# Altium PCB v0 - Copy.PcbDoc
Units mil, origin at the board's own origin, x right, y up, seen from the top; angles counter-clockwise.
Board outline 4539.37 x 1732.28 mil, 2 copper layers (Top Layer, Bottom Layer), stack 65.398 mil thick; 4 components, 67 nets, 201 pads, 41 vias.
Unrouted connection lines stored in the file: 78.
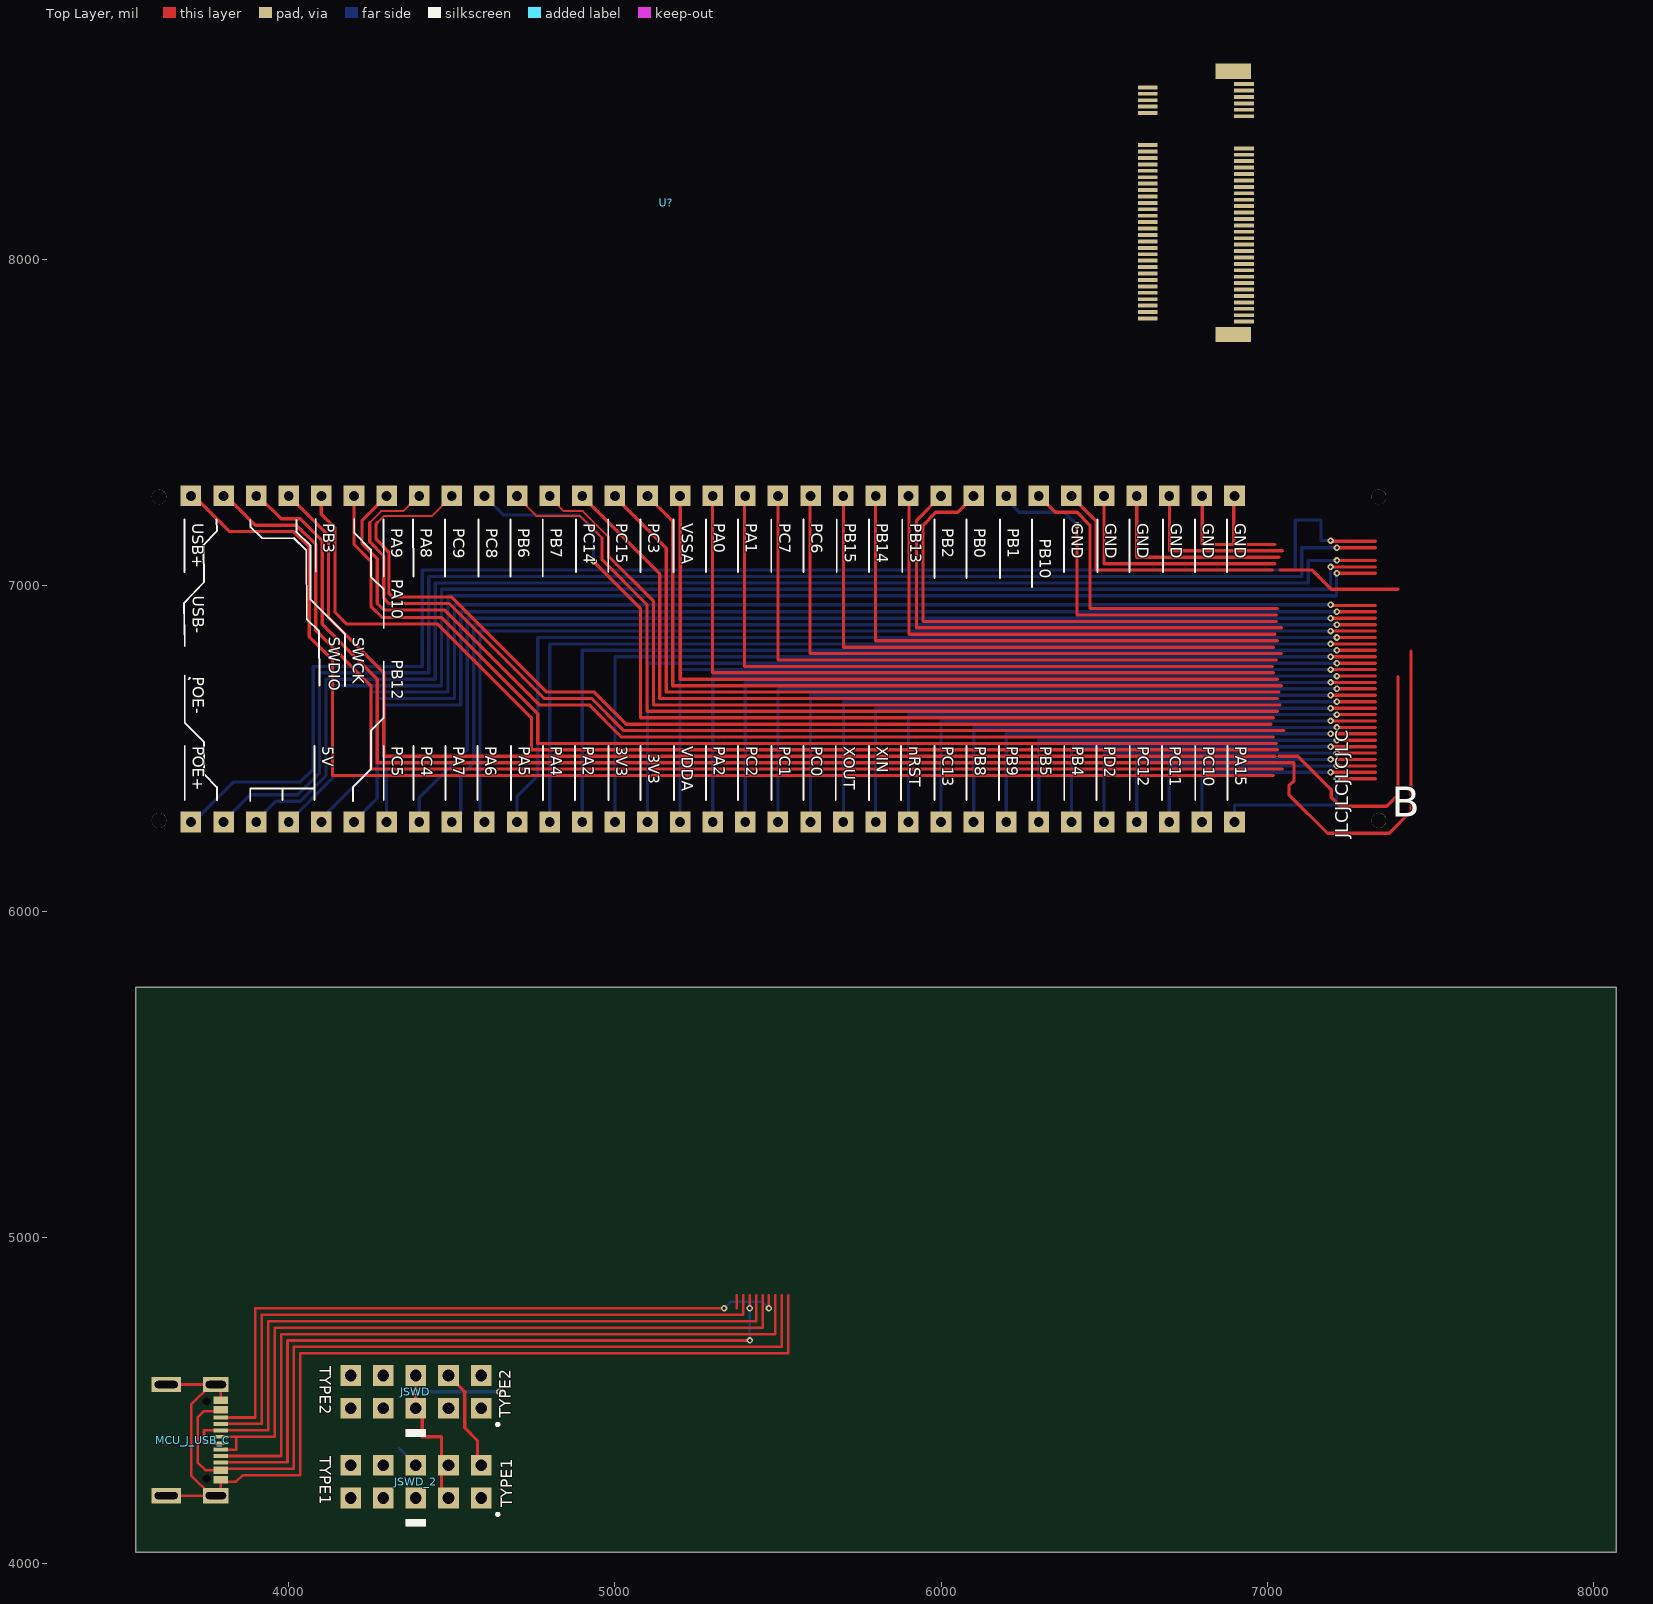
[diagram p0: Top Layer view]
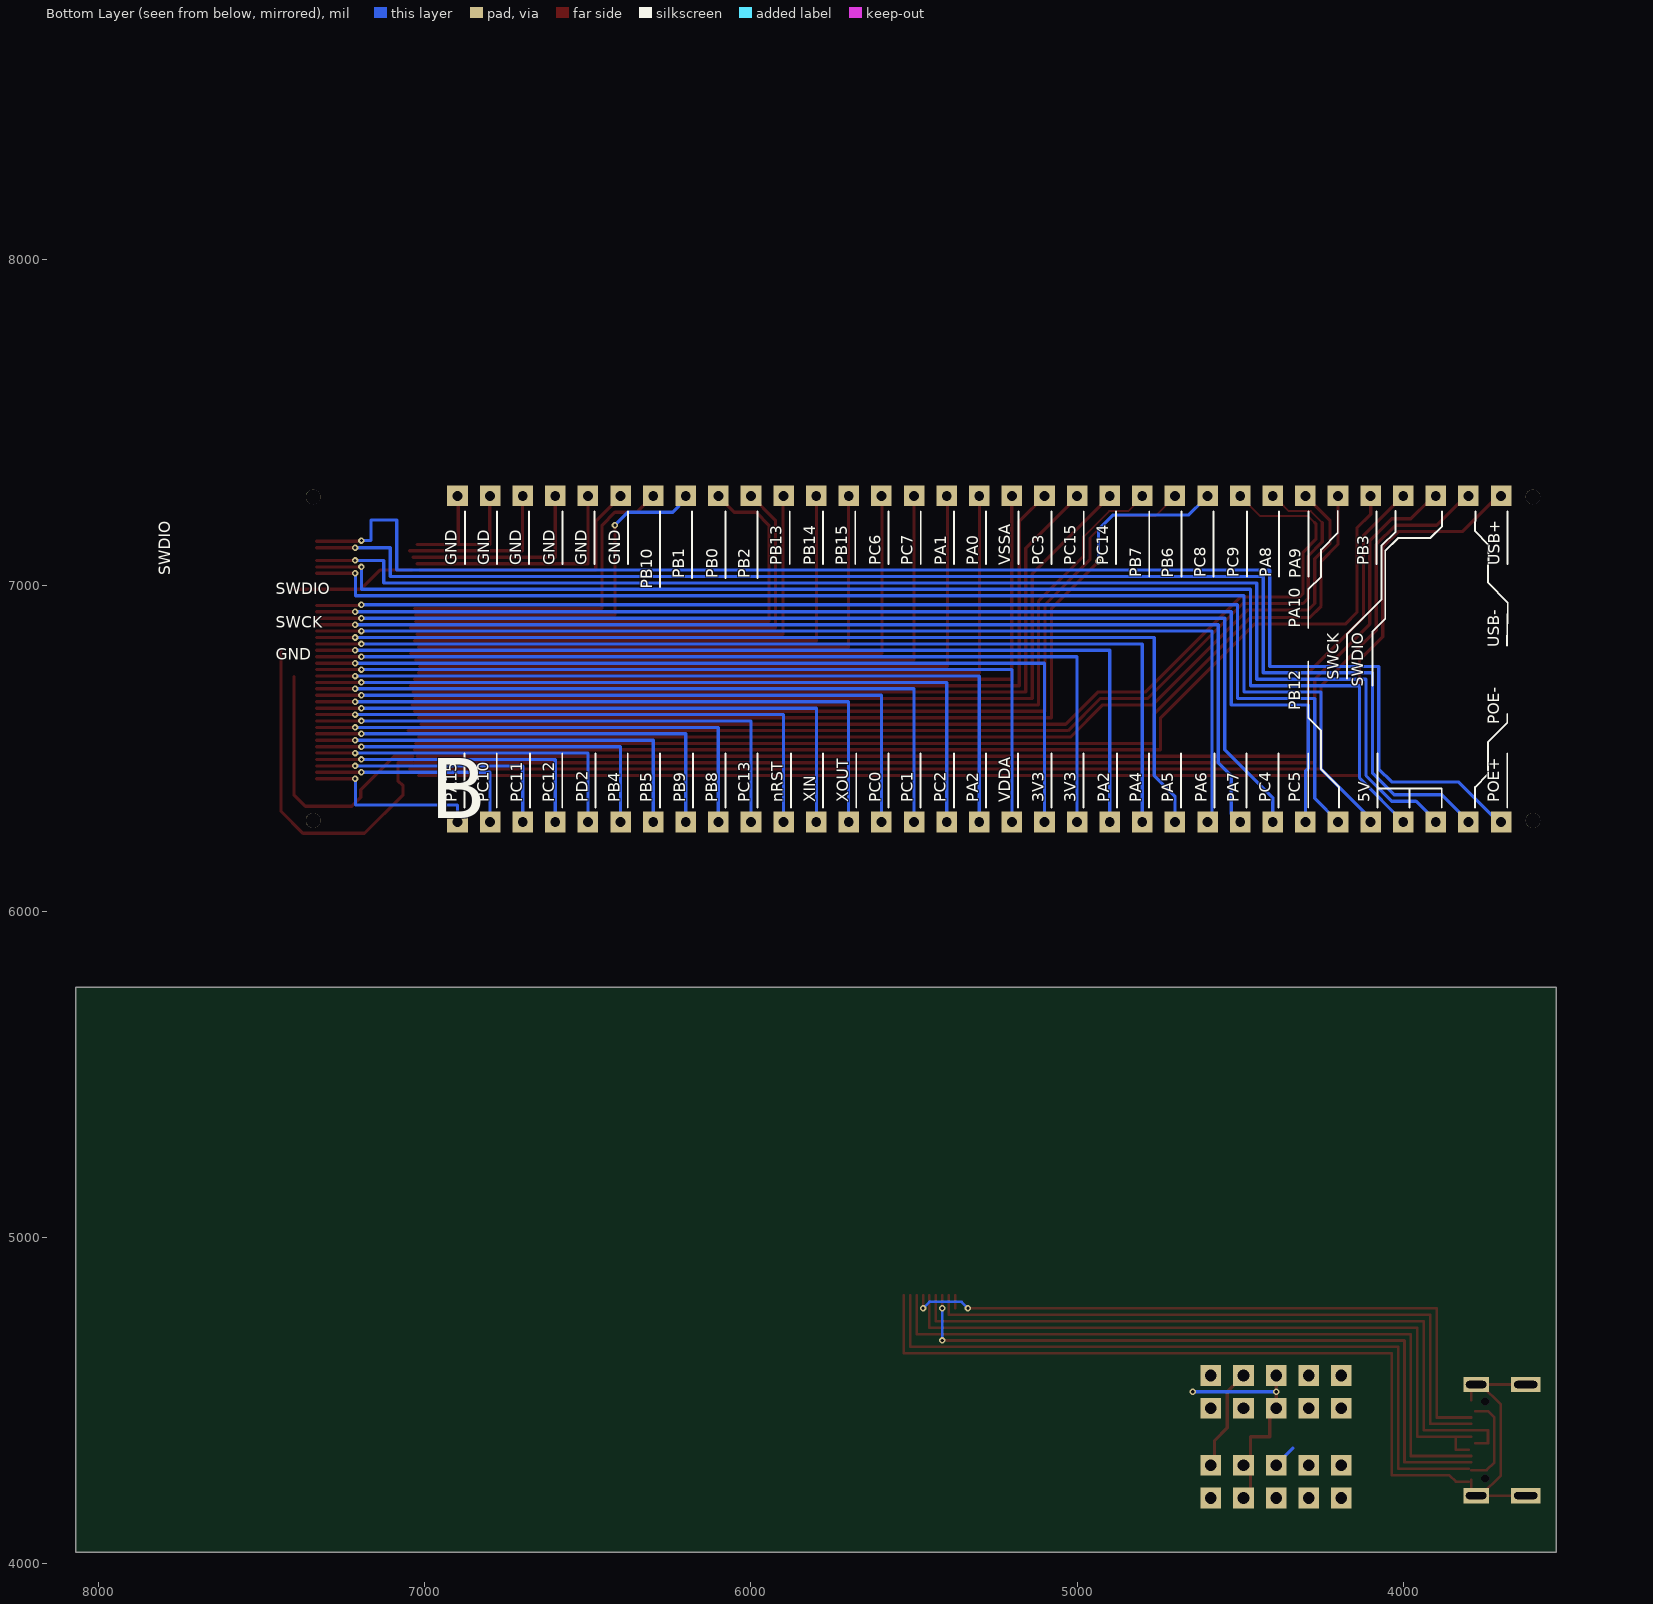
[diagram p1: Bottom Layer view, seen from below]

## Layer stack, top to bottom
Top Solder: solder mask 0.4, Solder Resist, Dk 3.5
Top Layer: signal copper 1.4
Dielectric 1: core 62.5984, FR-4, Dk 4.2
Bottom Layer: signal copper 1.4
Bottom Solder: solder mask 0.4, Solder Resist, Dk 3.5

## Board outline
3531.5,4035.43 3531.5,5767.72 8070.87,5767.71 8070.87,4035.43

## Design rules (kind name [scope] priority, off if disabled: settings)
Clearance [All] p1: gap=7.87 ignorepadtopadclearanceinfootprint=FALSE except(0: Arc-Hole Track-Hole SMDPad-Hole THPad-Hole Via-Hole Fill-Hole Poly-Hole Region-Hole Text-Hole)
PolygonConnect [All] p1: thpad.connectstyle=Relief thpad.reliefconductorwidth=10 thpad.reliefentries=4 thpad.polygonreliefangle="90 Angle" thpad.airgapwidth=10 smdpad.connectstyle=Relief smdpad.reliefconductorwidth=10 smdpad.reliefentries=4 smdpad.polygonreliefangle="90 Angle" smdpad.airgapwidth=10 via.connectstyle=Direct via.reliefconductorwidth=10 via.reliefentries=4 via.polygonreliefangle="90 Angle" via.airgapwidth=10
RoomDefinition v0 [InComponentClass('v0')] p1: confinementstyle=ConfineIn formatcopy=TRUE lockcomponents=FALSE outline 0,0 2000,0 2000,1000 0,1000
RoutingVias [All] p1: holewidth=28 width=50 viastyle="Through Hole" minholewidth=28 minwidth=50 maxholewidth=28 maxwidth=50
SolderMaskExpansion [All] p1: expansion=4
Width [All] p1: maxlimit=39.37 minlimit=5.91 preferedwidth=7.87
30 further rules are at their usual default settings.

## Components (designator, comment, footprint, x,y, rotation, side; value= is the part's Value field where it differs from the comment)
JSWD "DS1023-2*5SF11" HDR_FEM_2X5P 4389.76,4527.56 r180 top
JSWD_2 "DS1023-2*5SF11" HDR_FEM_2X5P 4389.76,4251.97 r180 top
MCU_J_USB_C "918-418K2023S40001" DX07S016JA1R1500 3661.42,4379.92 r270 top
U? "BITSNAP_GF_B" POWERNET-MAC 6791.34,8173.23 r90 top

## Footprints (in the part's own frame and the unit in brackets; to place one, negate y for a bottom-side part, rotate by r counter-clockwise, add the part's x,y. Pads: shape width x height; smd on the part's side, far side on the other; paste and mask are expansions set on the pad)
DX07S016JA1R1500 [mm] "USB-C (USB TYPE-C) USB 2.0 Receptacle Connector 24 (16+8 Dummy) Position Surface Mount, Right Angle"
  rect 1.2x2 hole 0.55 slot 1.6 at 90 deg: 0(-4.32,2.917) 0(4.33,2.917)
  rect 1.2x2.3 hole 0.55 slot 1.8 at 90 deg: 0(-4.32,-0.943) 0(4.33,-0.943)
  rect 0.6x1.15 smd: A1_B12(-3.1,3.297) A4_B9(-2.35,3.297) A9_B4(2.35,3.3) A12_B1(3.1,3.297)
  rect 0.3x1.15 smd: A5(-1.25,3.297) A6(-0.25,3.297) A7(0.25,3.3) A8(1.25,3.297) B5(1.75,3.297) B6(0.75,3.297) B7(-0.75,3.297) B8(-1.75,3.297)
  round 0 hole 0.65 unplated: M(-3,2.2) M(3,2.2)
  body extent -4.47,-3.35 4.47,3.55, height 3.18
HDR_FEM_2X5P [mm] "10 Pin 2 Row Header"
  rect 1.6x1.6 hole 0.9: 1(-5.08,1.27) 2(-5.08,-1.27) 3(-2.54,1.27) 4(-2.54,-1.27) 5(0,1.27) 6(0,-1.27) 7(2.54,1.27) 8(2.54,-1.27) 9(5.08,1.27) 10(5.08,-1.27)
  silkscreen extent -6.47,2.44 -6.27,2.64
POWERNET-MAC [mm] "IC - Powernet MAC - NGFF B KEY, TE 2199119-3"
  rect 0.3x1.55 smd: 1(9.25,-3.5) 2(9,4) 3(8.75,-3.5) 4(8.5,4) 5(8.25,-3.5) 6(8,4) 7(7.75,-3.5) 8(7.5,4) 9(7.25,-3.5) 10(7,4) 11(6.75,-3.5) 20(4.5,4) 21(4.25,-3.5) 22(4,4) 23(3.75,-3.5) 24(3.5,4) 25(3.25,-3.5) 26(3,4) 27(2.75,-3.5) 28(2.5,4) 29(2.25,-3.5) 30(2,4) 31(1.75,-3.5) 32(1.5,4) 33(1.25,-3.5) 34(1,4) 35(0.75,-3.5) 36(0.5,4) 37(0.25,-3.5) 38(0,4) 39(-0.25,-3.5) 40(-0.5,4) 41(-0.75,-3.5) 42(-1,4) 43(-1.25,-3.5) 44(-1.5,4) 45(-1.75,-3.5) 46(-2,4) 47(-2.25,-3.5) 48(-2.5,4) 49(-2.75,-3.5) 50(-3,4) 51(-3.25,-3.5) 52(-3.5,4) 53(-3.75,-3.5) 54(-4,4) 55(-4.25,-3.5) 56(-4.5,4) 57(-4.75,-3.5) 58(-5,4) 59(-5.25,-3.5) 60(-5.5,4) 61(-5.75,-3.5) 62(-6,4) 63(-6.25,-3.5) 64(-6.5,4) 65(-6.75,-3.5) 66(-7,4) 67(-7.25,-3.5) 68(-7.5,4) 69(-7.75,-3.5) 70(-8,4) 71(-8.25,-3.5) 72(-8.5,4) 73(-8.75,-3.5) 74(-9,4) 75(-9.25,-3.5)
  round 0 hole 1.6 unplated: 76(-10,1.75)
  round 0 hole 1.1 unplated: 76(10,1.75)
  round 1.524 hole 2 slot 7 at 90 deg unplated: H(-8,83.9) H(8,83.9)
  round 1.524 hole 2 slot 5 at 0 deg unplated: H(-5.5,76.2) H(5.8,76.2)
  round 1.524 hole 2 slot 5 at 90 deg unplated: H(-5.2,70.5)
  round 1.524 hole 2 unplated: H(-5.2,59.5) H(-5.2,64.4)
  round 1.524 hole 2 slot 18 at 0 deg unplated: H(0,86.5) H(0,86) H(0,85.5) H(0,85) H(0,84.5) H(0,84) H(0,83.5) H(0,83) H(0,82.5) H(0,82) H(0,81.5) H(0,81.1) H(0,81)
  round 1.524 hole 2 slot 15 at 90 deg unplated: H(9.9,66.45)
  round 1.524 hole 2 slot 10 at 90 deg unplated: H(9.9,25.5)
  rect 1.2x2.75 smd: M(-10.25,-2.65) M(10.25,-2.65)
  Bottom Layer pour cut-out: -17.2,17.6
  Bottom Layer pour cut-out: -17.2,17.6
  body extent -10.99,-4.1 11.01,91.64, height 16.88

## Part data
JSWD JSWD_2: "J - JACK - PIN_HEADER 2X5P", JLC Availability=Extended, LCSC Part #=C92270
MCU_J_USB_C: "J - JACK - USB - Type C - Recepticle - SMT - 90°", JLC Availability=LCSC, LCSC Part #=C167321
U?: library part POWERNET_MAC, "U - IC - Bitsnap CPU, NGFF B Key", LCSC Part #=C2761344, Manufacturer=Foxconn, Manufacturer P/N=AS0BC21-S30BB-7H

## Free pads (board coordinates)
  rect 62.99x62.99 hole 30: 2(3700,6274.8) 2(3700,7274.8) 2(3800,6274.8) 2(3800,7274.8) 2(3900,6274.8) 2(3900,7274.8) 2(4000,6274.8) 2(4000,7274.8) 2(4100,6274.8) 2(4100,7274.8) 2(4200,6274.8) 2(4200,7274.8) 2(4300,6274.8) 2(4300,7274.8) 2(4400,6274.8) 2(4400,7274.8) 2(4500,6274.8) 2(4500,7274.8) 2(4600,6274.8) 2(4600,7274.8) 2(4700,6274.8) 2(4700,7274.8) 2(4800,6274.8) 2(4800,7274.8) 2(4900,6274.8) 2(4900,7274.8) 2(5000,6274.8) 2(5000,7274.8) 2(5100,6274.8) 2(5100,7274.8) 2(5200,6274.8) 2(5200,7274.8) 2(5300,6274.8) 2(5300,7274.8) 2(5400,6274.8) 2(5400,7274.8) 2(5500,6274.8) 2(5500,7274.8) 2(5600,6274.8) 2(5600,7274.8) 2(5700,6274.8) 2(5700,7274.8) 2(5800,6274.8) 2(5800,7274.8) 2(5900,6274.8) 2(5900,7274.8) 2(6000,6274.8) 2(6000,7274.8) 2(6100,6274.8) 2(6100,7274.8) 2(6200,6274.8) 2(6200,7274.8) 2(6300,6274.8) 2(6300,7274.8) 2(6400,6274.8) 2(6400,7274.8) 2(6500,6274.8) 2(6500,7274.8) 2(6600,6274.8) 2(6600,7274.8) 2(6700,6274.8) 2(6700,7274.8) 2(6800,6274.8) 2(6800,7274.8) 2(6900,6274.8) 2(6900,7274.8)
  round 45.35 hole 45.35 unplated: 11(3602.36,6279.53) 11(3602.36,7271.65) 11(7342.52,6279.53) 11(7342.52,7271.65)

## Via types
v1: diameter 20, hole 10, Top Layer to Bottom Layer, tented both sides, 41 vias

## Nets (pads, with @x,y where several pads share a name; then routed paths per layer and width w, separated by ;. In a path a pad name is that pad's centre, name@x,y a point inside that pad or via, vN(x,y) a via of type N, cw(c..) or ccw(c..) an arc to the next point about the centre after c; other vN are vias at no path point)
&^~PB6_SCL1: pad.2@4700,7274.8 U?.54 | length 2805.8
  Top Layer w5.91: pad.2@4720.47,7251.97 4759.84,7212.6 4893.7,7212.6 4960.63,7145.67
  Top Layer w10: 4960.63,7145.67 4960.63,7078.74 5098.43,6940.94 5098.43,6614.17 7031.5,6614.17
&^~PB7_SDA1: pad.2@4800,7274.8 U?.52 | length 2729.7
  Top Layer w5.91: pad.2@4799.21,7271.65 4842.52,7228.35 4901.57,7228.35 4980.31,7149.61
  Top Layer w10: 4980.31,7086.61 4980.31,7090.55 ; 4980.31,7149.61 4980.31,7090.55 ; 7039.37,6633.86 7037.01,6633.86 5118.11,6633.86 5118.11,6952.76 4980.31,7090.55
&~PA1_ADC1: pad.2@5400,7274.8 U?.40 | length 2141.7
  Top Layer w10: pad.2@5397.64,7275.59 5397.64,6751.97 6937.01,6751.97 7015.75,6751.97
^PA15: pad.2@6900,6274.8 U?.75 | length 568.9
  Top Layer w10: v1@7212.2,6405.51 7212.2,6407.48 7332.28,6407.48
  Bottom Layer w10: pad.2@6899.61,6273.62 6899.61,6326.77 7212.6,6326.77 v1@7212.6,6407.48
  other v1: 7214.17,6407.48
^PB2_BOOT1: pad.2@6000,7274.8 U?.28 | length 1554.6
  Top Layer w10: pad.2@6000,7275.59 5925.2,7200.79 5925.2,6870.08 7037,6870.08 7043.31,6870.08
^PB4: pad.2@6400,6274.8 U?.65 | length 1163
  Top Layer w10: v1(7194.49,6505.91) 7332.28,6505.91
  Bottom Layer w10: pad.2@6400,6275.59 6400,6505.91 7192.91,6505.91 v1@7192.91,6503.94
^PB10_SCL2_RX3: pad.2@6300,7274.8 U?.22 | length 1025.7
  Top Layer w10: pad.2@6299.21,7275.59 6300,7274.8 6350.39,7224.41 6417.32,7224.41 6456.69,7185.04 6456.69,6929.13 7031.5,6929.13
^PB11_SDA2_TX3: U?.20
^PB12_SS2: pad.2@4200,6274.8 U?.21 | length 3756.1
  Top Layer w10: v1(7194.49,6940.94) 7194.49,6938.98 7332.28,6938.98
  Bottom Layer w10: pad.2@4200,6275.59 4271.65,6347.24 4271.65,6653.54 4507.87,6653.54 4507.87,6940.94 v1@7192.91,6940.94
^PB13_SCK2: pad.2@5900,7274.8 U?.30 | length 1559
  Top Layer w10: pad.2@5901.57,7271.65 5901.57,6850.39 6921.26,6850.39 ; 6937,6850.39 6921.26,6850.39 ; 7023.62,6850.39 6921.26,6850.39
^PB14_MISO2: pad.2@5800,7274.8 U?.32 | length 1673.2
  Top Layer w10: pad.2@5799.21,7271.65 5799.21,6830.71 6937.01,6830.71 7031.5,6830.71
^PB15_MOSI2: pad.2@5700,7274.8 U?.34 | length 1799.2
  Top Layer w10: pad.2@5700.79,7271.65 5700.79,6811.02 6917.32,6811.02 ; 6937,6811.02 6917.32,6811.02 ; 7019.69,6811.02 6917.32,6811.02
^~PA8: pad.2@4400,7274.8 U?.60 | length 3339.6
  Top Layer w5.91: 4248.03,7192.91 4283.46,7228.35 4350.39,7228.35 pad.2@4381.89,7259.84
  Top Layer w9.84: 4248.03,7133.86 4248.03,7192.91 ; 4291.34,7090.55 4291.34,6960.63 4307.09,6944.88 4492.13,6944.88 4783.46,6653.54 4929.13,6653.54 5027.56,6555.12 6937.01,6555.12 7051.18,6555.12
  Top Layer w10: 4248.03,7133.86 4291.34,7090.55
^~PA9_TX1: pad.2@4300,7274.8 U?.62 | length 3303.5
  Top Layer w10: pad.2@4299.21,7275.59 4300,7274.8 4224.41,7199.21 4224.41,7129.92 4271.65,7082.68 4271.65,6944.88 4291.34,6925.2 4476.38,6925.2 4767.72,6633.86 4921.26,6633.86 5019.69,6535.43 6933.07,6535.43 ; 6937.01,6535.43 6933.07,6535.43 ; 7019.69,6535.43 6933.07,6535.43
^~PA10_RX1: pad.2@4200,7274.8 U?.64 | length 3370.3
  Top Layer w10: pad.2@4200,7274.8 4200,7126.77 4251.97,7074.8 4251.97,6937.01 4287.4,6901.57 4468.5,6901.57 4763.78,6606.3 4763.78,6515.75 6929.13,6515.75 ; 6937.01,6515.75 6929.13,6515.75 ; 7027.56,6515.75 6929.13,6515.75
eth_V+: pad.2@3700,6274.8 U?.1 | length 4530.4
  Top Layer w10: v1(7194.49,7137.8) 7194.49,7135.83 7332.28,7135.83
  Bottom Layer w10: pad.2@3700.79,6267.72 3830.71,6397.64 4035.43,6397.64 4074.8,6437.01 4074.8,6751.97 4409.45,6751.97 4409.45,7047.24 7086.61,7047.24 7086.61,7200.79 7165.35,7200.79 7165.35,7137.8 v1(7194.49,7137.8)
eth_V-: pad.2@3800,6274.8 U?.3 | length 4286
  Top Layer w10: v1(7214.17,7116.14) 7332.28,7116.14
  Bottom Layer w10: pad.2@3799.21,6275.59 3881.89,6358.27 4027.56,6358.27 4094.49,6425.2 4094.49,6732.28 4429.13,6732.28 4429.13,7027.56 7106.3,7027.56 7106.3,7116.14 v1(7214.17,7116.14)
GND: JSWD.5 JSWD.6 JSWD_2.3 JSWD_2.4 pad.2@6400,7274.8 pad.2@6500,7274.8 pad.2@6600,7274.8 pad.2@6700,7274.8 pad.2@6800,7274.8 pad.2@6900,7274.8 U?.2 U?.4 U?.6 U?.8 U?.10 | length 4319.1
  Top Layer w10: JSWD.6 v1(4389.76,4527.56) JSWD.5 4409.45,4457.87 4409.45,4389.76 4468.5,4389.76 JSWD_2.3@4468.5,4192.91 ; pad.2@6399.61,7273.62 6476.38,7196.85 6476.38,7047.24 7015.75,7047.24 ; pad.2@6500,7275.59 6500,7274.8 6500,7066.93 6901.57,7066.93 ; pad.2@6600.39,7273.62 6600.39,7086.61 6933.07,7086.61 ; pad.2@6700.79,7273.62 6700.79,7106.3 7037.01,7106.3 7047.24,7106.3 ; pad.2@6801.18,7273.62 6801.18,7125.98 6897.64,7125.98 ; pad.2@6897.64,7275.59 6897.64,7125.98 ; 6937.01,7066.93 6901.57,7066.93 ; 6937.01,7086.61 6933.07,7086.61 ; 7023.62,7066.93 6901.57,7066.93 ; 7023.62,7125.98 6897.64,7125.98 ; 7035.43,7086.61 6933.07,7086.61 ; 7039.37,7047.24 7137.8,7047.24 7196.85,6988.19 7401.57,6988.19
  Bottom Layer w10: v1(4389.76,4527.56) v1(4645.67,4527.56)
LB_GND: MCU_J_USB_C.0 MCU_J_USB_C.A1_B12 MCU_J_USB_C.A12_B1 | length 3064.1
  Top Layer w7.87: MCU_J_USB_C.0@3624.29,4209.45 3756.69,4209.45 MCU_J_USB_C.0@3759.84,4212.6 ; MCU_J_USB_C.0@3641.73,4547.24 3644.49,4550 MCU_J_USB_C.0@3776.26,4550 ; MCU_J_USB_C.0@3759.84,4547.24 3700.79,4488.19 3700.79,4271.65 MCU_J_USB_C.0@3759.84,4212.6 ; MCU_J_USB_C.0@3776.26,4209.45 3762.99,4209.45 MCU_J_USB_C.0@3759.84,4212.6 ; MCU_J_USB_C.0@3779.53,4547.24 3791.22,4535.55 MCU_J_USB_C.A1_B12 ; MCU_J_USB_C.A12_B1 3791.22,4220.59 MCU_J_USB_C.0@3799.21,4212.6 ; MCU_J_USB_C.A12_B1@3799.21,4251.97 3838.58,4251.97 3858.27,4271.65 4035.43,4271.65 4035.43,4645.67 5531.5,4645.67 5531.5,4822.83
LB_SWCK: MCU_J_USB_C.A8 | length 2134
  Top Layer w7.87: MCU_J_USB_C.A8 3858.27,4330.71 3897.64,4330.71 3976.38,4330.71 3976.38,4704.72 5492.13,4704.72 5492.13,4763.78
LB_SWDIO: MCU_J_USB_C.B8 | length 2032.2
  Top Layer w7.87: MCU_J_USB_C.B8 3897.64,4448.82 3897.64,4783.46 v1(5334.65,4783.46)
  Bottom Layer w7.87: v1(5334.65,4783.46) 5354.33,4803.15 5452.76,4803.15 5472.44,4783.46
LB_USB_5V: MCU_J_USB_C.A4_B9 MCU_J_USB_C.A9_B4 | length 2529.7
  Top Layer w7.87: MCU_J_USB_C.A4_B9@3779.53,4468.5 3740.16,4468.5 3720.47,4448.82 3720.47,4311.02 3744.09,4287.4 MCU_J_USB_C.A9_B4 ; MCU_J_USB_C.A9_B4@3799.21,4291.34 4015.75,4291.34 4015.75,4665.35 5511.81,4665.35 5511.81,4822.83
LB_USB_CC1: MCU_J_USB_C.A5 | length 1937.1
  Top Layer w7.87: MCU_J_USB_C.A5 3897.64,4429.13 3917.32,4429.13 3917.32,4763.78 5393.7,4763.78
LB_USB_CC2: MCU_J_USB_C.B5 | length 1996.2
  Top Layer w7.87: MCU_J_USB_C.B5 3996.06,4311.02 3996.06,4685.04 v1(5413.39,4685.04)
LB_USB_DM: MCU_J_USB_C.A7 MCU_J_USB_C.B7 | length 2145.7
  Top Layer w7.87: MCU_J_USB_C.A7@3779.53,4370.08 3740.16,4370.08 3740.16,4409.45 MCU_J_USB_C.B7 3937.01,4409.45 3937.01,4744.09 5433.07,4744.09 5433.07,4783.46
LB_USB_DP: MCU_J_USB_C.A6 MCU_J_USB_C.B6 | length 2134
  Top Layer w7.87: MCU_J_USB_C.A6 3838.58,4389.76 ; MCU_J_USB_C.B6@3799.21,4350.39 3838.58,4350.39 3838.58,4389.76 ; 5452.76,4783.46 5452.76,4724.41 3956.69,4724.41 3956.69,4389.76 3897.64,4389.76 3838.58,4389.76
NRST: pad.2@5900,6274.8 U?.55 | length 1769.3
  Top Layer w10: v1(7214.17,6604.33) 7332.28,6604.33
  Bottom Layer w10: pad.2@5900,6271.65 5900,6604.33 v1(7214.17,6604.33) 7216.54,6604.33 v1@7216.54,6602.36
PA4_ADC4_SS1: pad.2@4800,6274.8 U?.33 | length 3083.9
  Top Layer w10: v1(7194.49,6820.87) 7332.28,6820.87
  Bottom Layer w10: pad.2@4800,6273.62 4800,6820.87 v1(7194.49,6820.87) 7196.85,6820.87 v1@7196.85,6822.83
PA5_ADC5_SCK1: pad.2@4700,6274.8 U?.31 | length 3164.2
  Top Layer w10: v1(7214.17,6840.55) 7332.28,6840.55
  Bottom Layer w10: pad.2@4700,6271.65 4700,6274.8 4700,6353.54 4763.78,6417.32 4763.78,6840.55 7212.6,6840.55 v1@7212.6,6838.58
PB3: pad.2@4100,7274.8 U?.66 | length 3496.7
  Top Layer w10: pad.2@4100,7274.8 4100,7218.9 4141.73,7177.17 4141.73,6917.32 4177.17,6881.89 4456.69,6881.89 4744.09,6594.49 4744.09,6496.06 6937.01,6496.06 7031.5,6496.06
PB5: pad.2@6300,6274.8 U?.63 | length 1284.6
  Top Layer w10: v1(7214.17,6525.59) 7332.28,6525.59
  Bottom Layer w10: pad.2@6300,6273.62 6300,6525.59 7212.6,6525.59 v1@7212.6,6523.62
PC0: pad.2@5600,6274.8 U?.49 | length 2125.2
  Top Layer w10: v1(7194.49,6663.39) 7332.28,6663.39
  Bottom Layer w10: pad.2@5600,6274.8 5600,6663.39 7094.49,6663.39 v1(7194.49,6663.39) 7196.85,6663.39 v1@7196.85,6661.42
PC1: pad.2@5500,6274.8 U?.47 | length 2226.4
  Top Layer w10: v1(7214.17,6683.07) 7332.28,6683.07
  Bottom Layer w10: pad.2@5500,6289.37 5500,6683.07 7212.6,6683.07 v1@7212.6,6685.04
PC2: pad.2@5400,6274.8 U?.45 | length 2355.9
  Top Layer w10: v1(7194.49,6702.76) 7332.28,6702.76
  Bottom Layer w10: pad.2@5400,6279.53 5400,6702.76 7192.91,6702.76 v1@7192.91,6704.72
PC3: pad.2@5100,7274.8 U?.46 | length 2481.4
  Top Layer w10: pad.2@5098.43,7275.59 5177.17,7196.85 5177.17,6692.91 7037.01,6692.91 7043.31,6692.91
PC4: pad.2@4400,6274.8 U?.25 | length 3474.4
  Top Layer w10: v1(7194.49,6899.61) 7332.28,6899.61
  Bottom Layer w10: pad.2@4400,6271.65 4400,6274.8 4400,6348.82 4547.24,6496.06 4547.24,6899.61 7192.91,6899.61 v1@7192.91,6901.57
PC5: pad.2@4300,6274.8 U?.23 | length 3696.5
  Top Layer w10: v1(7214.17,6919.29) 7332.28,6919.29
  Bottom Layer w10: pad.2@4300,6267.72 4300,6274.8 4300,6430.61 4291.34,6439.27 4291.34,6633.86 4527.56,6633.86 4527.56,6919.29 7212.6,6919.29 v1@7212.6,6917.32
PC6: pad.2@5600,7274.8 U?.36 | length 1929.1
  Top Layer w10: pad.2@5598.43,7275.59 5598.43,6791.34 7037.01,6791.34 7043.31,6791.34
PC7: pad.2@5500,7274.8 U?.38 | length 2035.4
  Top Layer w10: pad.2@5500,7271.65 5500,6771.65 6929.13,6771.65 ; 6937.01,6771.65 6929.13,6771.65 ; 7027.56,6771.65 6929.13,6771.65
PC8: pad.2@4600,7274.8 U?.56 | length 2941
  Top Layer w10: v1@4933.07,7074.8 5078.74,6929.13 5078.74,6594.49 6937.01,6594.49 7019.69,6594.49
  Bottom Layer w10: pad.2@4610.24,7263.78 4657.48,7216.54 4889.76,7216.54 4934.65,7171.65 v1(4934.65,7074.8)
PC9: pad.2@4500,7274.8 U?.58 | length 3368.4
  Top Layer w5.91: 4271.65,7192.91 4291.34,7212.6 4437.8,7212.6 pad.2@4500,7274.8 ; pad.2@4500,7275.59 pad.2@4500.39,7275.2
  Top Layer w10: 4271.65,7192.91 4267.72,7188.98 4267.72,7141.73 4307.09,7102.36 4307.09,6976.38 4318.9,6964.57 4500,6964.57 4791.34,6673.23 4937.01,6673.23 5035.43,6574.8 5059.06,6574.8 7011.81,6574.8
PC10: pad.2@6800,6274.8 U?.73 | length 688.2
  Top Layer w10: v1(7194.49,6427.17) 7332.28,6427.17
  Bottom Layer w10: pad.2@6800,6275.59 6800,6427.17 v1(7194.49,6427.17) 7196.85,6427.17 v1@7196.85,6429.13
PC11: pad.2@6700,6274.8 U?.71 | length 811.8
  Top Layer w10: v1(7214.17,6446.85) 7332.28,6446.85
  Bottom Layer w10: pad.2@6700,6271.65 6700,6446.85 v1(7214.17,6446.85) 7216.54,6446.85 v1@7216.54,6444.88
PC12: pad.2@6600,6274.8 U?.69 | length 924.4
  Top Layer w10: v1(7194.49,6466.54) 7332.28,6466.54
  Bottom Layer w10: pad.2@6600,6274.8 6600,6466.54 7192.91,6466.54 v1@7192.91,6468.5
PC13: pad.2@6000,6274.8 U?.57 | length 1645.7
  Top Layer w10: v1(7194.49,6584.65) 7332.28,6584.65
  Bottom Layer w10: pad.2@6000,6271.65 6000,6584.65 7192.91,6584.65 v1@7192.91,6582.68
PC14: pad.2@4900,7274.8 U?.50 | length 2609.7
  Top Layer w10: pad.2@4901.57,7271.65 5137.8,7035.43 5137.8,6653.54 7031.5,6653.54
PC15: pad.2@5000,7274.8 U?.48 | length 2541.6
  Top Layer w10: pad.2@5000,7271.65 5157.48,7114.17 5157.48,6673.23 6937.01,6673.23 7035.43,6673.23
PD2: pad.2@6500,6274.8 U?.67 | length 1049.2
  Top Layer w10: v1(7214.17,6486.22) 7332.28,6486.22
  Bottom Layer w10: pad.2@6500,6273.62 6500,6486.22 v1(7214.17,6486.22) 7216.54,6486.22 v1@7216.54,6488.19
SWDCK: JSWD.2 JSWD_2.6 pad.2@4000,7274.8 U?.68 | length 4552
  Top Layer w10: pad.2@4000,7275.59 4000,7274.8 4122.05,7152.76 4122.05,6901.57 4291.34,6732.28 4291.34,6476.38 6925.2,6476.38 ; JSWD.2@4586.61,4566.93 JSWD.2@4586.61,4574.8 ; 6937.01,6476.38 6925.2,6476.38 ; 7023.62,6476.38 6925.2,6476.38 ; 7037.01,6476.38 7094.49,6476.38 7196.85,6374.02 7196.85,6350.39 7224.41,6322.83 7366.14,6322.83 7401.57,6358.27 7401.57,6720.47
  Bottom Layer w10: 4338.58,4354.33 JSWD_2.6@4381.89,4311.02
SWDIO: JSWD.4 JSWD_2.2 pad.2@3900,7274.8 U?.70 | length 5153
  Top Layer w10: pad.2@3917.32,7263.78 3976.38,7204.72 4035.43,7204.72 4102.36,7137.8 4102.36,6881.89 4271.65,6712.6 4271.65,6456.69 6937.01,6456.69 7031.5,6456.69 ; JSWD.4 JSWD.4@4500.39,4566.93 ; JSWD.4@4496.06,4566.93 JSWD.4@4500.39,4566.93 ; JSWD.4@4507.87,4566.93 JSWD.4@4500.39,4566.93 ; JSWD_2.2@4578.74,4314.96 4578.74,4377.95 4539.37,4417.32 4539.37,4527.95 JSWD.4@4500.39,4566.93 ; 7037.01,6456.69 7082.68,6456.69 7082.68,6401.57 7066.93,6385.83 7066.93,6358.27 7185.04,6240.16 7374.02,6240.16 7440.94,6307.09 7440.94,6799.21
USB_DM: pad.2@3800,7274.8 U?.72 | length 3903.1
  Top Layer w10: pad.2@3799.21,7283.46 3897.64,7185.04 4023.62,7185.04 4082.68,7125.98 4082.68,6862.2 4251.97,6692.91 4251.97,6437.01 7037.01,6437.01 7047.24,6437.01
USB_DP: pad.2@3700,7274.8 U?.74 | length 4046.7
  Top Layer w10: pad.2@3700.79,7283.46 3818.9,7165.35 4015.75,7165.35 4062.99,7118.11 4062.99,6842.52 4133.86,6771.65 4133.86,6417.32 7019.69,6417.32
VCC_3V3: pad.2@5000,6274.8 pad.2@5100,6274.8 U?.37 U?.39 | length 5571.3
  Top Layer w10: v1(7194.49,6781.5) 7332.28,6781.5 ; v1(7214.17,6761.81) 7332.28,6761.81
  Bottom Layer w10: pad.2@5000,6271.65 5000,6781.5 v1(7194.49,6781.5) 7196.85,6781.5 v1@7196.85,6783.46 ; pad.2@5100,6273.62 5100,6761.81 v1(7214.17,6761.81) 7216.54,6761.81 v1@7216.54,6763.78
VCC_5V: pad.2@3900,6274.8 pad.2@4000,6274.8 pad.2@4100,6274.8 U?.7 U?.9 U?.11 | length 12085.3
  Top Layer w10: v1(7194.49,7057.09) 7332.28,7057.09 ; v1(7214.17,7037.4) 7332.28,7037.4 ; v1(7214.17,7076.77) 7332.28,7076.77
  Bottom Layer w10: pad.2@3901.57,6279.53 3960.63,6338.58 4035.43,6338.58 4114.17,6417.32 4114.17,6712.6 4448.82,6712.6 4448.82,7007.87 7125.98,7007.87 7125.98,7076.77 v1@7212.6,7076.77 ; pad.2@3996.06,6271.65 4133.86,6409.45 4133.86,6692.91 4468.5,6692.91 4468.5,6988.19 7125.59,6988.19 7125.98,6988.58 7165.75,6988.58 ; pad.2@4102.36,6287.4 4251.97,6437.01 4251.97,6673.23 4488.19,6673.23 4488.19,6968.5 7212.6,6968.5 v1@7212.6,7035.43 ; 7165.35,6988.19 7194.49,6988.19 v1(7194.49,7057.09) 7196.85,7057.09 v1@7196.85,7059.06 ; v1@7212.6,7037.4 v1(7214.17,7037.4) ; v1@7212.6,7074.8 v1@7212.6,7076.77 ; v1(7214.17,7076.77) v1@7212.6,7076.77
VDDA: pad.2@5200,6274.8 U?.41 | length 2605.9
  Top Layer w10: v1@7194.49,6744.09 v1(7194.49,6742.13) 7332.28,6742.13
  Bottom Layer w10: pad.2@5200,6274.8 5200,6742.13 v1(7194.49,6742.13) 7196.85,6742.13 v1@7196.85,6740.16
VSSA: pad.2@5200,7274.8 U?.44 | length 2393.7
  Top Layer w10: pad.2@5200.79,7275.59 5200.79,6712.6 7031.5,6712.6
XIN: pad.2@5800,6274.8 U?.53 | length 1883.9
  Top Layer w10: v1@7192.91,6625.98 7194.88,6624.02 7332.28,6624.02
  Bottom Layer w10: pad.2@5799.21,6275.59 5799.21,6624.02 v1(7194.49,6624.02)
XOUT: pad.2@5700,6274.8 U?.51 | length 1998.1
  Top Layer w10: v1@7216.54,6641.73 7218.5,6643.7 7332.28,6643.7
  Bottom Layer w10: pad.2@5700.79,6275.59 5700.79,6643.7 v1(7214.17,6643.7)
~PA0_ADC0: pad.2@5300,7274.8 U?.42 | length 2259.8
  Top Layer w10: pad.2@5299.21,7271.65 5299.21,6732.28 6937.01,6732.28 7019.69,6732.28
~PA2_ADC2_TX2: pad.2@5300,6274.8 U?.43 | length 2469.7
  Top Layer w10: v1(7214.17,6722.44) 7332.28,6722.44
  Bottom Layer w10: pad.2@5300,6285.43 5300,6722.44 7212.6,6722.44 v1@7212.6,6724.41
~PA3_ADC3_RX2: pad.2@4900,6274.8 U?.35 | length 2970.1
  Top Layer w10: v1(7214.17,6801.18) 7332.28,6801.18
  Bottom Layer w10: pad.2@4900,6263.78 4900,6801.18 7212.6,6801.18 v1@7212.6,6799.21
~PA6_ADC6_MISO1: pad.2@4600,6274.8 U?.29 | length 3341
  Top Layer w10: v1(7194.49,6860.24) 7332.28,6860.24
  Bottom Layer w10: pad.2@4600,6274.8 4586.61,6288.19 4586.61,6860.24 7094.49,6860.24 v1(7194.49,6860.24) 7196.85,6860.24 v1@7196.85,6862.2
~PA7_ADC7_MOSI1: pad.2@4500,6274.8 U?.27 | length 3401.7
  Top Layer w10: v1(7214.17,6879.92) 7332.28,6879.92
  Bottom Layer w10: pad.2@4500,6271.65 4527.56,6299.21 4527.56,6417.32 4566.93,6456.69 4566.93,6879.92 7212.6,6879.92 v1@7212.6,6877.95
~PB0_ADC8: pad.2@6100,7274.8 U?.26 | length 1567.4
  Top Layer w10: pad.2@6098.43,7271.65 6051.18,7224.41 5984.25,7224.41 5944.88,7185.04 5944.88,6889.76 7027.56,6889.76
~PB1_ADC9: pad.2@6200,7274.8 U?.24 | length 1135
  Top Layer w10: v1(6417.32,7185.04) 6417.32,6909.45 7027.56,6909.45
  Bottom Layer w10: pad.2@6200.79,7263.78 6240.16,7224.41 6377.95,7224.41 v1(6417.32,7185.04)
~PB8_CANTX: pad.2@6100,6274.8 U?.59 | length 1522
  Top Layer w10: v1(7214.17,6564.96) 7332.28,6564.96
  Bottom Layer w10: pad.2@6100,6275.59 6100,6564.96 7212.6,6564.96 v1@7212.6,6562.99
~PB9_CANRX: pad.2@6200,6274.8 U?.61 | length 1410.2
  Top Layer w10: v1(7194.49,6545.28) 7332.28,6545.28
  Bottom Layer w10: pad.2@6200,6271.65 6200,6545.28 v1(7194.49,6545.28) 7196.85,6545.28 v1@7196.85,6543.31
pads on no net: JSWD.1 JSWD.3 JSWD.7 JSWD.8 JSWD.9 JSWD.10 JSWD_2.1 JSWD_2.5 JSWD_2.7 JSWD_2.8 JSWD_2.9 JSWD_2.10 MCU_J_USB_C.M U?.5 U?.76 U?.H U?.M
copper on no net: | length 413.4
  Top Layer w7.87: 5374.02,4783.46 5374.02,4822.83 ; 5393.7,4763.78 5393.7,4783.46 5393.7,4822.83 ; v1(5413.39,4783.46) 5413.39,4822.83 ; 5433.07,4783.46 5433.07,4822.83 ; 5452.76,4783.46 5452.76,4822.83 ; v1(5472.44,4783.46) 5472.44,4822.83 ; 5492.13,4763.78 5492.13,4822.83
  Bottom Layer w7.87: 5413.39,4685.04 v1(5413.39,4783.46)

## Polygon pours and split planes (outlines as drawn)
no net on Bottom Layer "Bottom Layer-No Net" (solid, pour order 16): 4039.37,6460.63
no net on Bottom Layer "Bottom Layer-No Net 1" (solid, pour order 14): 4838.58,6460.63
no net on Bottom Layer "Bottom Layer-No Net 2" (solid, pour order 12): 5637.8,6460.63
no net on Bottom Layer "Bottom Layer-No Net 3" (solid, pour order 10): 6437.01,6460.63

## Silkscreen, mask and mechanical layers (free items; w line width, h text height)
Top Overlay:
  region: 4358.27,4137.8 4358.27,4114.17 4421.26,4114.17 4421.26,4137.8
  region: 4358.27,4413.39 4358.27,4389.76 4421.26,4389.76 4421.26,4413.39
  lines w5.91: 3680.32,7041.73 3680.32,7203.15 ; 3681.1,6342.52 3681.1,6507.87 ; 3681.1,6724.41 3681.1,6578.74 3740.16,6519.69 3740.16,6421.26 3779.53,6381.89 3779.53,6342.52 ; 3681.1,6814.96 3678.37,6945.97 3740.51,7010.75 3738.15,7123.89 3779.49,7166.99 3778.74,7203.15 ; 3692.91,6712.6 3696.85,6716.54 ; 3881.89,6338.58 3881.89,6377.95 3980.31,6377.95 ; 3881.92,7200.79 3882.07,7180.42 3918.04,7144.96 4015.18,7145.67 4053.6,7107.8 4055.12,6897.07 4093.28,6859.46 4094.49,6692.91 ; 3980.32,6342.52 3980.32,6377.95 ; 4023.62,7200.79 4023.62,7165.35 4066.93,7122.05 4066.93,6956.69 4172.44,6851.18 4172.44,6691.34 ; 4078.74,6342.52 4078.74,6507.87 ; 4078.74,6377.95 3980.32,6377.95 ; 4082.68,7043.31 4082.68,7204.72 ; 4196.85,6338.58 4196.85,6381.89 4251.97,6437.01 4251.97,6555.12 4291.34,6594.49 4291.34,6767.72 ; 4200.79,7204.72 4200.79,7161.42 4251.97,7110.24 4251.97,7027.56 4291.34,6988.19 ; 4290.55,7203.15 4291.34,7027.56 ; 4291.34,6342.52 4291.34,6507.87 ; 4291.34,6870.08 4291.34,6988.19 ; 4291.34,6889.76 4291.34,6988.19 ; 4381.1,7203.15 4381.89,7027.56 ; 4381.89,6342.52 4381.89,6507.87 ; 4479.53,7027.56 4479.53,7203.15 ; 4480.31,6342.52 4480.31,6507.87 ; 4578.74,6342.52 4578.74,6507.87 ; 4581.89,7027.56 4581.89,7203.15 ; 4680.31,7027.56 4680.31,7203.15 ; 4681.1,6342.52 4681.1,6507.87 ; 4778.74,7027.56 4778.74,7203.15 ; 4779.53,6342.52 4779.53,6507.87 ; 4877.95,6342.52 4877.95,6507.87 ; 4881.1,7041.73 4881.1,7203.15 ; 4979.53,7041.73 4979.53,7203.15 ; 4980.31,6342.52 4980.31,6507.87 ; 5077.95,7041.73 5077.95,7203.15 ; 5078.74,6342.52 5078.74,6507.87 ; 5180.31,7041.73 5180.31,7203.15 ; 5181.1,6342.52 5181.1,6507.87 ; 5278.74,7041.73 5278.74,7203.15 ; 5279.53,6342.52 5279.53,6507.87 ; 5377.17,7041.73 5377.17,7203.15 ; 5377.95,6342.52 5377.95,6507.87 ; 5479.53,7041.73 5479.53,7203.15 ; 5480.31,6342.52 5480.31,6507.87 ; 5577.95,7041.73 5577.95,7203.15 ; 5578.74,6342.52 5578.74,6507.87 ; 5677.17,6342.52 5677.17,6507.87 ; 5680.31,7041.73 5680.31,7203.15 ; 5778.74,7041.73 5778.74,7203.15 ; 5779.53,6342.52 5779.53,6507.87 ; 5877.95,6342.52 5877.95,6507.87 ; 5881.1,7041.73 5881.1,7203.15 ; 5979.53,7023.62 5979.53,7203.15 ; 5980.31,6342.52 5980.31,6507.87 ; 6077.95,7023.62 6077.95,7203.15 ; 6078.74,6342.52 6078.74,6507.87 ; 6177.17,6342.52 6177.17,6507.87 ; 6180.31,7023.62 6180.31,7203.15 ; 6278.74,6996.06 6278.74,7203.15 ; 6279.53,6342.52 6279.53,6507.87 ; 6377.17,7041.73 6377.17,7203.15 ; 6377.95,6342.52 6377.95,6507.87 ; 6476.38,6342.52 6476.38,6507.87 ; 6479.53,7041.73 6479.53,7203.15 ; 6577.95,7041.73 6577.95,7203.15 ; 6578.74,6342.52 6578.74,6507.87 ; 6677.17,6342.52 6677.17,6507.87 ; 6680.31,7041.73 6680.31,7203.15 ; 6778.74,7041.73 6778.74,7203.15 ; 6779.53,6342.52 6779.53,6507.87 ; 6877.17,7041.73 6877.17,7203.15 ; 6877.95,6342.52 6877.95,6507.87
  text "B" at 7145.67,9350.39 h157.48 r180
  text "B" at 4181.1,8677.17 h314.96
  text "USB+" at 3692.13,7191.34 h60 r270
  text "PB3" at 4093.7,7191.34 h60 r270
  text "PC14" at 4892.91,7191.34 h60 r270
  text "PC15" at 4991.34,7191.34 h60 r270
  text "PC3" at 5089.76,7191.34 h60 r270
  text "VSSA" at 5192.13,7191.34 h60 r270
  text "PA0" at 5290.55,7191.34 h60 r270
  text "PA1" at 5388.98,7191.34 h60 r270
  text "PC7" at 5491.34,7191.34 h60 r270
  text "PC6" at 5589.76,7191.34 h60 r270
  text "PB15" at 5692.13,7191.34 h60 r270
  text "PB14" at 5790.55,7191.34 h60 r270
  text "PB13" at 5892.91,7191.34 h60 r270
  text "GND" at 6388.98,7191.34 h60 r270
  text "GND" at 6491.34,7191.34 h60 r270
  text "GND" at 6589.76,7191.34 h60 r270
  text "GND" at 6692.13,7191.34 h60 r270
  text "GND" at 6790.55,7191.34 h60 r270
  text "GND" at 6888.98,7191.34 h60 r270
  text "PA9" at 4302.36,7175.59 h60 r270
  text "PA8" at 4392.91,7175.59 h60 r270
  text "PC9" at 4491.34,7175.59 h60 r270
  text "PC8" at 4593.7,7175.59 h60 r270
  text "PB6" at 4692.13,7175.59 h60 r270
  text "PB7" at 4790.55,7175.59 h60 r270
  text "PB2" at 5991.34,7175.59 h60 r270
  text "PB0" at 6089.76,7175.59 h60 r270
  text "PB1" at 6192.13,7175.59 h60 r270
  text "PB10" at 6290.55,7144.09 h60 r270
  text "PA10" at 4303.15,7019.69 h60 r270
  text "USB-" at 3692.91,6968.5 h60 r270
  text "SWDIO" at 4110.24,6842.52 h60 r270
  text "SWCK" at 4184.25,6840.94 h60 r270
  text "PB12" at 4303.15,6771.65 h60 r270
  text "POE-" at 3692.91,6720.47 h60 r270
  text "POE+" at 3692.91,6507.87 h60 r270
  text "5V" at 4090.55,6507.87 h60 r270
  text "PC5" at 4303.15,6507.87 h60 r270
  text "PC4" at 4393.7,6507.87 h60 r270
  text "PA7" at 4492.13,6507.87 h60 r270
  text "PA6" at 4590.55,6507.87 h60 r270
  text "PA5" at 4692.91,6507.87 h60 r270
  text "PA4" at 4791.34,6507.87 h60 r270
  text "PA2" at 4889.76,6507.87 h60 r270
  text "3V3" at 4992.13,6507.87 h60 r270
  text "VDDA" at 5192.91,6507.87 h60 r270
  text "PA2" at 5291.34,6507.87 h60 r270
  text "PC2" at 5389.76,6507.87 h60 r270
  text "PC1" at 5492.13,6507.87 h60 r270
  text "PC0" at 5590.55,6507.87 h60 r270
  text "XOUT" at 5688.98,6507.87 h60 r270
  text "XIN" at 5791.34,6507.87 h60 r270
  text "nRST" at 5889.76,6507.87 h60 r270
  text "PC13" at 5992.13,6507.87 h60 r270
  text "PB8" at 6090.55,6507.87 h60 r270
  text "PB9" at 6188.98,6507.87 h60 r270
  text "PB5" at 6291.34,6507.87 h60 r270
  text "PB4" at 6389.76,6507.87 h60 r270
  text "PD2" at 6488.19,6507.87 h60 r270
  text "PC12" at 6590.55,6507.87 h60 r270
  text "PC11" at 6688.98,6507.87 h60 r270
  text "PC10" at 6791.34,6507.87 h60 r270
  text "PA15" at 6889.76,6507.87 h60 r270
  text "3V3" at 5090.55,6484.25 h60 r270
  text "B" at 7381.89,6259.84 h157.48
  text "JLCJLCJLCJLC" at 7248.03,6224.41 h39.37 r90
  text "TYPE2" at 4082.68,4606.3 h60 r270
  text "TYPE2" at 4692.91,4448.82 h60 r90
  text "TYPE1" at 4082.68,4330.71 h60 r270
  text "TYPE1" at 4696.85,4173.23 h60 r90
Bottom Overlay:
  lines w5.91: 3680.32,7065.35 3680.32,7226.77 ; 3681.1,6318.9 3681.1,6484.25 ; 3681.1,6606.3 3681.1,6578.74 3740.16,6519.69 3740.16,6421.26 3779.53,6381.89 3779.53,6318.9 ; 3681.24,6815.88 3679.56,6947.23 3740.19,7009.44 3738.71,7124.5 3779.51,7166.36 3778.74,7226.77 ; 3881.1,7226.77 3881.1,7181.89 3917.32,7145.67 4015.75,7145.67 4055.12,7106.3 4055.12,6897.64 4094.49,6858.27 4094.49,6692.91 ; 3881.89,6318.9 3881.89,6377.95 4078.74,6377.95 ; 3980.32,6318.9 3980.32,6377.95 ; 4023.62,7228.35 4023.62,7165.35 4066.93,7122.05 4066.93,6956.69 4172.44,6851.18 4172.44,6714.96 ; 4078.74,6318.9 4078.74,6484.25 ; 4081.89,7065.35 4081.89,7226.77 ; 4196.85,6318.9 4196.85,6381.89 4251.97,6437.01 4251.97,6555.12 4291.34,6594.49 4291.34,6767.72 ; 4200.79,7228.35 4200.79,7161.42 4251.97,7110.24 4251.97,7027.56 4291.34,6988.19 4291.34,6870.08 ; 4290.55,7027.56 4290.55,7226.77 ; 4291.34,6318.9 4291.34,6484.25 ; 4381.1,7027.56 4381.1,7226.77 ; 4381.89,6318.9 4381.89,6484.25 ; 4479.53,7027.56 4479.53,7226.77 ; 4480.31,6318.9 4480.31,6484.25 ; 4578.74,6318.9 4578.74,6484.25 ; 4581.89,7027.56 4581.89,7226.77 ; 4680.31,7027.56 4680.31,7226.77 ; 4681.1,6318.9 4681.1,6484.25 ; 4778.74,7027.56 4778.74,7226.77 ; 4779.53,6318.9 4779.53,6484.25 ; 4877.95,6318.9 4877.95,6484.25 ; 4881.1,7065.35 4881.1,7226.77 ; 4979.53,7065.35 4979.53,7226.77 ; 4980.31,6318.9 4980.31,6484.25 ; 5077.95,7065.35 5077.95,7226.77 ; 5078.74,6318.9 5078.74,6484.25 ; 5180.31,7065.35 5180.31,7226.77 ; 5181.1,6318.9 5181.1,6484.25 ; 5278.74,7065.35 5278.74,7226.77 ; 5279.53,6318.9 5279.53,6484.25 ; 5377.17,7065.35 5377.17,7226.77 ; 5377.95,6318.9 5377.95,6484.25 ; 5479.53,7065.35 5479.53,7226.77 ; 5480.31,6318.9 5480.31,6484.25 ; 5577.95,7065.35 5577.95,7226.77 ; 5578.74,6318.9 5578.74,6484.25 ; 5677.17,6318.9 5677.17,6484.25 ; 5680.31,7065.35 5680.31,7226.77 ; 5778.74,7065.35 5778.74,7226.77 ; 5779.53,6318.9 5779.53,6484.25 ; 5877.95,6318.9 5877.95,6484.25 ; 5881.1,7065.35 5881.1,7226.77 ; 5979.53,7226.77 5980.31,7023.62 ; 5980.31,6318.9 5980.31,6484.25 ; 6077.95,7226.77 6078.74,7023.62 ; 6078.74,6318.9 6078.74,6484.25 ; 6177.17,6318.9 6177.17,6484.25 ; 6180.31,7226.77 6181.1,7023.62 ; 6278.74,6996.06 6278.74,7226.77 ; 6279.53,6318.9 6279.53,6484.25 ; 6377.17,7065.35 6377.17,7226.77 ; 6377.95,6318.9 6377.95,6484.25 ; 6476.38,6318.9 6476.38,6484.25 ; 6479.53,7065.35 6479.53,7226.77 ; 6577.95,7065.35 6577.95,7226.77 ; 6578.74,6318.9 6578.74,6484.25 ; 6677.17,6318.9 6677.17,6484.25 ; 6680.31,7065.35 6680.31,7226.77 ; 6778.74,7065.35 6778.74,7226.77 ; 6779.53,6318.9 6779.53,6484.25 ; 6877.17,7065.35 6877.17,7226.77 ; 6877.95,6318.9 6877.95,6484.25
  text "USB+" at 3692.13,7061.42 h60 r270
  text "PB3" at 4093.7,7061.42 h60 r270
  text "PC14" at 4892.91,7061.42 h60 r270
  text "PC15" at 4991.34,7061.42 h60 r270
  text "PC3" at 5089.76,7061.42 h60 r270
  text "VSSA" at 5192.13,7061.42 h60 r270
  text "PA0" at 5290.55,7061.42 h60 r270
  text "PA1" at 5388.98,7061.42 h60 r270
  text "PC7" at 5491.34,7061.42 h60 r270
  text "PC6" at 5589.76,7061.42 h60 r270
  text "PB15" at 5692.13,7061.42 h60 r270
  text "PB14" at 5790.55,7061.42 h60 r270
  text "PB13" at 5892.91,7061.42 h60 r270
  text "GND" at 6388.98,7061.42 h60 r270
  text "GND" at 6491.34,7061.42 h60 r270
  text "GND" at 6589.76,7061.42 h60 r270
  text "GND" at 6692.13,7061.42 h60 r270
  text "GND" at 6790.55,7061.42 h60 r270
  text "GND" at 6889.8,7061.42 h60 r270
  text "SWDIO" at 7767.72,7031.5 h60 r270
  text "PA8" at 4392.91,7025.98 h60 r270
  text "PC9" at 4491.34,7025.98 h60 r270
  text "PC8" at 4593.7,7025.98 h60 r270
  text "PB7" at 4790.55,7025.98 h60 r270
  text "PB6" at 4692.91,7023.62 h60 r270
  text "PA9" at 4302.36,7022.05 h60 r270
  text "PB2" at 5991.34,7022.05 h60 r270
  text "PB0" at 6089.76,7022.05 h60 r270
  text "PB1" at 6192.13,7022.05 h60 r270
  text "PB10" at 6290.55,6990.55 h60 r270
  text "SWDIO" at 7456.69,6960.63 h60
  text "PA10" at 4303.15,6870.08 h60 r270
  text "SWCK" at 7456.69,6858.27 h60
  text "USB-" at 3692.91,6811.02 h60 r270
  text "GND" at 7456.69,6759.84 h60
  text "SWCK" at 4185.07,6711.02 h60 r270
  text "SWDIO" at 4110.24,6688.98 h60 r270
  text "PB12" at 4303.15,6618.11 h60 r270
  text "POE-" at 3692.91,6574.8 h60 r270
  text "POE+" at 3692.91,6334.65 h60 r270
  text "5V" at 4090.55,6334.65 h60 r270
  text "PC5" at 4303.15,6334.65 h60 r270
  text "PC4" at 4393.7,6334.65 h60 r270
  text "PA7" at 4492.13,6334.65 h60 r270
  text "PA6" at 4590.55,6334.65 h60 r270
  text "PA5" at 4692.91,6334.65 h60 r270
  text "PA4" at 4791.34,6334.65 h60 r270
  text "PA2" at 4889.76,6334.65 h60 r270
  text "3V3" at 4992.13,6334.65 h60 r270
  text "3V3" at 5090.55,6334.65 h60 r270
  text "VDDA" at 5192.91,6334.65 h60 r270
  text "PA2" at 5291.34,6334.65 h60 r270
  text "PC2" at 5389.76,6334.65 h60 r270
  text "PC1" at 5492.13,6334.65 h60 r270
  text "PC0" at 5590.55,6334.65 h60 r270
  text "XOUT" at 5688.98,6334.65 h60 r270
  text "XIN" at 5791.34,6334.65 h60 r270
  text "nRST" at 5889.76,6334.65 h60 r270
  text "PC13" at 5992.13,6334.65 h60 r270
  text "PB8" at 6090.55,6334.65 h60 r270
  text "PB9" at 6188.98,6334.65 h60 r270
  text "PB5" at 6291.34,6334.65 h60 r270
  text "PB4" at 6389.76,6334.65 h60 r270
  text "PD2" at 6488.19,6334.65 h60 r270
  text "PC12" at 6590.55,6334.65 h60 r270
  text "PC11" at 6688.98,6334.65 h60 r270
  text "PC10" at 6791.34,6334.65 h60 r270
  text "PA15" at 6889.76,6334.65 h60 r270
  text "B" at 6984.25,6224.8 h314.96
Board Outline (M30):
  lines w3.94: 3550,6224.8 8011.81,6224.8 8011.81,7326.67 3550,7326.67 3550,6224.8

## Panel: embedded boards
"..\system42_hw\cp4\CPU.PcbDoc" at 7102.36,5669.29, 1 rows x 1 columns, spacing 2500 x 1500, rotation 180